# EAGLE board Mutli-Stepper-Driver Rev 2 (EAGLE 8.0.0)
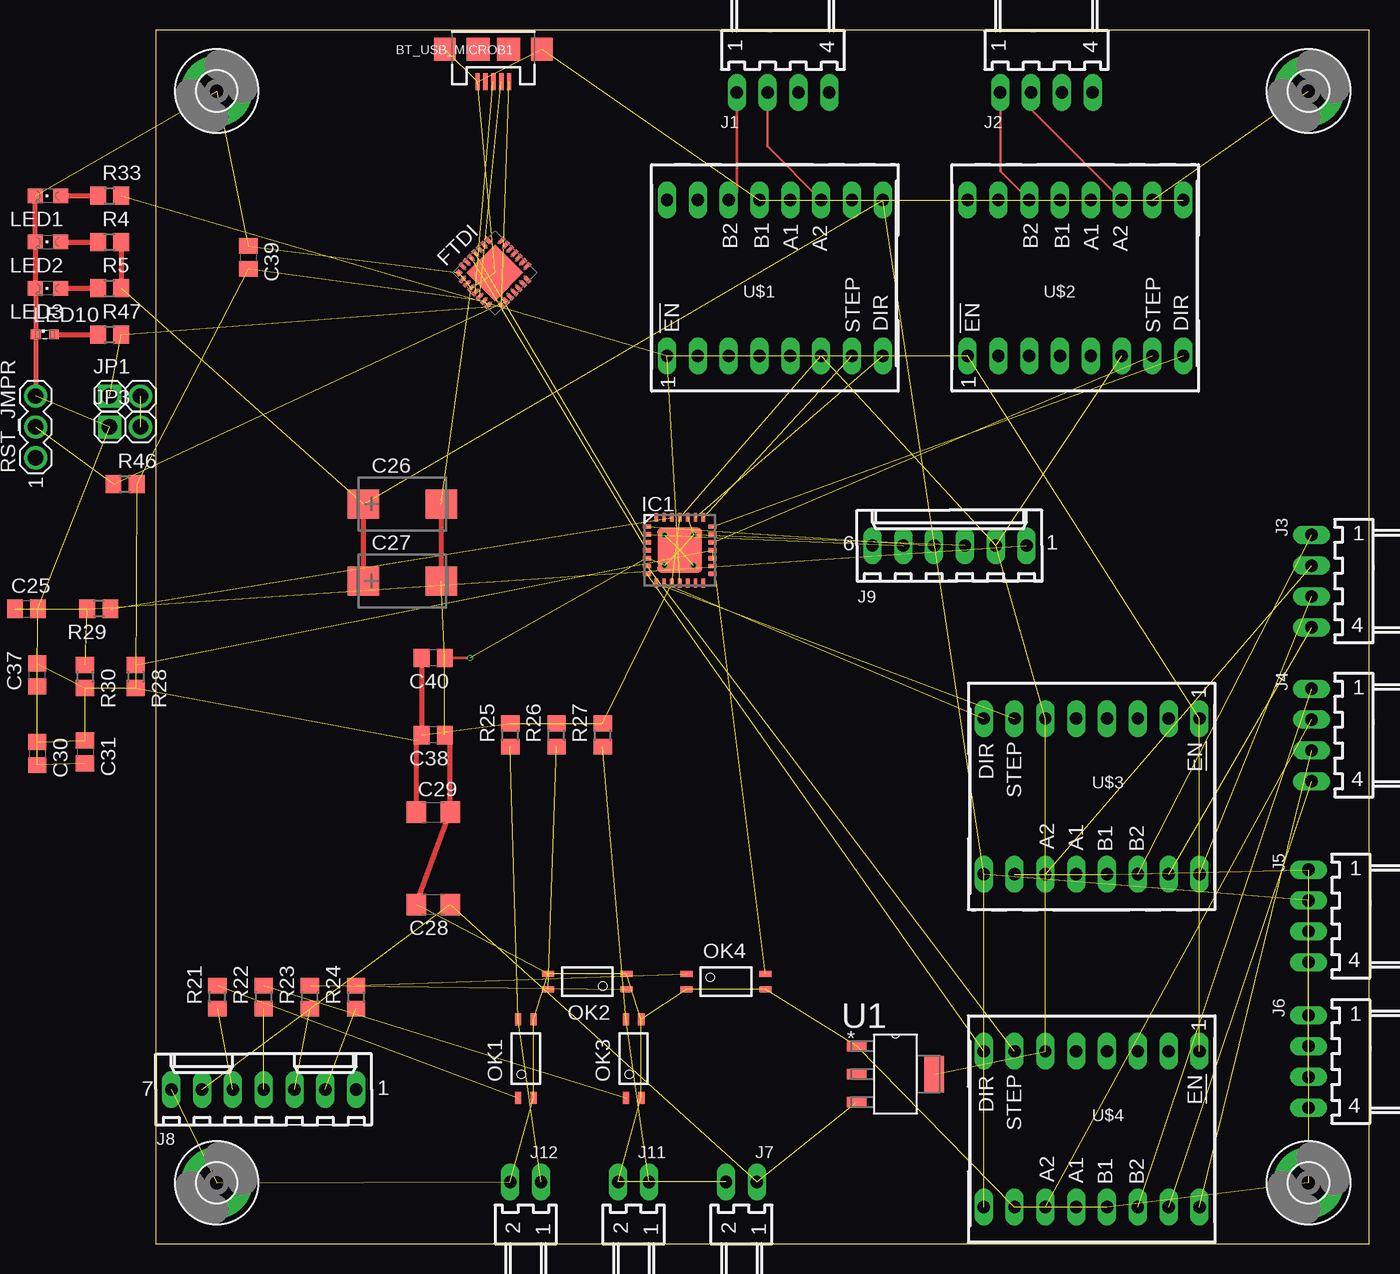
[diagram p0: board, top side]
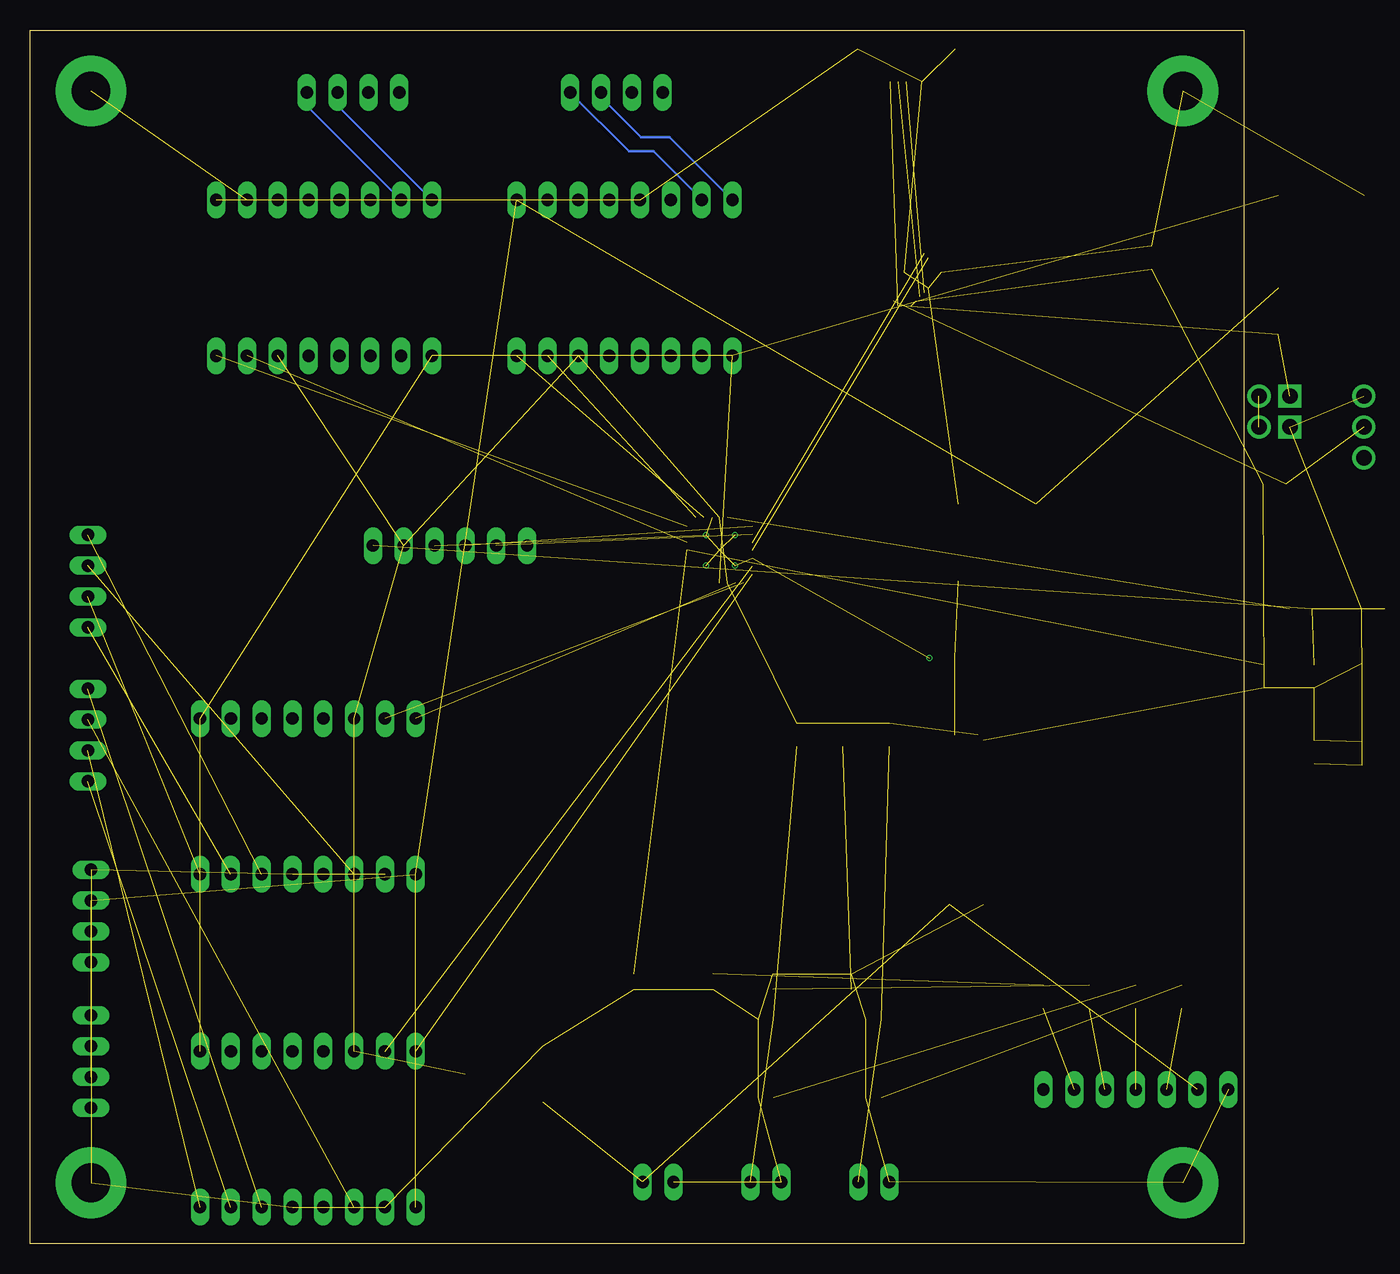
[diagram p1: board, bottom side, seen from below]

Size 100 x 100 mm. Coordinates in mm from the lower left corner, seen from the top.
Outline: 0,0 100,0 100,100 0,100 0,0
Copper layers (1*16): Top 0.035mm / dielectric 1.5mm / Bottom 0.035mm
Design rules "EagleRules-2-Layer-Shep": minimum track width 6mil, minimum drill 12mil, track to track 6mil, track to pad 6mil, pad to pad 6mil, via to via 6mil, smd to smd 0mil, copper to edge 10mil, drill to drill 10mil, minimum pad ring 2mil, minimum via ring 2mil, stop-mask expansion 2mil, vias tented up to drill 100mil, thermal gap 10mil

## Footprints (pad centres in the part's own frame; a part is rotated, then mirrored left to right if it is on the bottom)
USB-MICROB = smd 0.35 x 1.4: D+ 0,2.65; D- -0.65,2.65; GND 1.3,2.65; ID 0.65,2.65; VBUS -1.3,2.65 | smd 1.8 x 1.9: MT1 -4,0; MT2 4,0 | smd 1.9 x 1.9: P$1 -1.27,0; P$2 1.27,0
C0805 = smd 1.3 x 1.5: 1 -0.95,0; 2 0.95,0
CT7343 = smd 2.6 x 2.4: + -3.2,0; - 3.2,0
C3216 = smd 1.6 x 1.8: 1 -1.4,0; 2 1.4,0
MLP28 = smd 0.6 x 0.3: 1 -2.3,1.5; 2 -2.3,1; 3 -2.3,0.5; 4 -2.3,0; 5 -2.3,-0.5; 6 -2.3,-1; 7 -2.3,-1.5; 15 2.3,-1.5; 16 2.3,-1; 17 2.3,-0.5; 18 2.3,0; 19 2.3,0.5; 20 2.3,1; 21 2.3,1.5 | smd 0.3 x 0.6: 8 -1.5,-2.3; 9 -1,-2.3; 10 -0.5,-2.3; 11 0,-2.3; 12 0.5,-2.3; 13 1,-2.3; 14 1.5,-2.3; 22 1.5,2.3; 23 1,2.3; 24 0.5,2.3; 25 0,2.3; 26 -0.5,2.3; 27 -1,2.3; 28 -1.5,2.3 | smd 3.3 x 3.3: EXP 0,0 | smd 0.435 x 0.435: M -2.103,2.103
3,2-PAD = drill 3.2 pad 5.842: B3,2 0,0
MICROCHIP_QFN28-ML_6X6MM = smd 0.7 x 0.35: 1 -2.7,1.95; 2 -2.7,1.3; 3 -2.7,0.65; 4 -2.7,0; 5 -2.7,-0.65; 6 -2.7,-1.3; 7 -2.7,-1.95; 15 2.7,-1.95; 16 2.7,-1.3; 17 2.7,-0.65; 18 2.7,0; 19 2.7,0.65; 20 2.7,1.3; 21 2.7,1.95 | smd 0.35 x 0.7: 8 -1.95,-2.7; 9 -1.3,-2.7; 10 -0.65,-2.7; 11 0,-2.7; 12 0.65,-2.7; 13 1.3,-2.7; 14 1.95,-2.7; 22 1.95,2.7; 23 1.3,2.7; 24 0.65,2.7; 25 0,2.7; 26 -0.65,2.7; 27 -1.3,2.7; 28 -1.95,2.7 | smd 3.7 x 3.7: EXP 0,0
7395-04 = drill 1.016 long: 1 3.81,0; 2 1.27,0; 3 -1.27,0; 4 -3.81,0
SON_OF_DARK_POWERSCH_7395-02 = drill 1.016 long: 1 1.27,0; 2 -1.27,0
6410-07 = drill 1.016 long: 1 7.62,0; 2 5.08,0; 3 2.54,0; 4 0,0; 5 -2.54,0; 6 -5.08,0; 7 -7.62,0
6410-06 = drill 1.016 long: 1 6.35,0; 2 3.81,0; 3 1.27,0; 4 -1.27,0; 5 -3.81,0; 6 -6.35,0
1X02 = drill 1.27 square: 1 -1.27,0 | drill 1.27: 2 1.27,0
CHIPLED_0805 = smd 1.2 x 1.2: A 0,-1.05; C 0,1.05
SML0603 = smd 0.8 x 0.8: A 0.75,0; C -0.75,0
MINI-FLAT-4 = smd 1 x 0.5: 1 -3.24,0.635; 2 -3.24,-0.635; 3 3.24,-0.635; 4 3.24,0.635
R0805 = smd 1.3 x 1.5: 1 -0.95,0; 2 0.95,0
MA03-1 = drill 1.27: 1 -2.54,0; 2 0,0; 3 2.54,0
NSC-LMS8117AMP_SOT230P696X180-4N = smd 1.6 x 0.838: 1 -3.2,2.311; 2 -3.2,0; 3 -3.2,-2.311 | smd 1.6 x 3.023: 4 3.2,0
6410-08 = drill 1.016 long: 1 -0.1,13.62; 2 -0.1,11.08; 3 -0.1,8.54; 4 -0.1,6; 5 -0.1,3.46; 6 -0.1,0.92; 7 -0.1,-1.62; 8 -0.1,-4.16; 9 12.74,-4.16; 10 12.74,-1.62; 11 12.74,0.92; 12 12.74,8.54; 13 12.74,11.08; 14 12.74,13.62; 15 12.74,3.46; 16 12.74,6

## Placement (x,y rotation side)
BT_USB_MICROB1  USB-MICROB  [USB-MICROB]  27.81,98.42 180 top
C25  [C0805]  -10.67,52.32 0 top  (outside the outline)
C26  [CT7343]  20.32,60.96 0 top
C27  100 uF  [CT7343]  20.32,54.61 0 top
C28  10 uF  [C3216]  22.86,27.94 180 top
C29  10 uF  [C3216]  22.86,35.56 0 top
C30  [C0805]  -9.78,40.39 270 top  (outside the outline)
C31  [C0805]  -5.84,40.51 270 top  (outside the outline)
C37  1uF  [C0805]  -9.78,46.86 90 top  (outside the outline)
C38  0.1uF  [C0805]  22.86,41.91 180 top
C39  0.1uF  [C0805]  7.62,81.28 270 top
C40  4.7uF  [C0805]  22.86,48.26 180 top
FTDI  CP2102  [MLP28]  27.94,80.01 45 top
H1  MOUNT-PAD-ROUND3.2  [3,2-PAD]  5,5 0 top
H2  MOUNT-PAD-ROUND3.2  [3,2-PAD]  5,95 0 top
H3  MOUNT-PAD-ROUND3.2  [3,2-PAD]  95,95 0 top
H4  MOUNT-PAD-ROUND3.2  [3,2-PAD]  95,5 0 top
IC1  PIC24FJ64GB002  [MICROCHIP_QFN28-ML_6X6MM]  43.18,57.15 0 top
J1  22-05-7048-04  [7395-04]  51.69,94.87 180 top
J2  22-05-7048-04  [7395-04]  73.41,94.87 180 top
J3  22-05-7048-04  [7395-04]  95.25,54.61 90 top
J4  22-05-7048-04  [7395-04]  95.25,41.91 90 top
J5  22-05-7048-04  [7395-04]  95,27 90 top
J6  22-05-7048-04  [7395-04]  95,15 90 top
J7  SON_OF_DARK_POWERSCH_22-05-7028-02  [SON_OF_DARK_POWERSCH_7395-02]  48.26,5.08 0 top
J8  22-27-2071-07  [6410-07]  8.89,12.7 0 top
J9  22-27-2061-06  [6410-06]  65.41,57.53 0 top
J11  SON_OF_DARK_POWERSCH_22-05-7028-02  [SON_OF_DARK_POWERSCH_7395-02]  39.37,5.08 0 top
J12  SON_OF_DARK_POWERSCH_22-05-7028-02  [SON_OF_DARK_POWERSCH_7395-02]  30.48,5.08 0 top
JP1  [1X02]  -2.54,69.85 0 top
JP3  [1X02]  -2.54,67.31 0 top
LED1  [CHIPLED_0805]  -8.89,86.36 90 top  (outside the outline)
LED2  [CHIPLED_0805]  -8.89,82.55 90 top  (outside the outline)
LED3  [CHIPLED_0805]  -8.89,78.74 90 top  (outside the outline)
LED10  [SML0603]  -9.14,74.93 0 top  (outside the outline)
OK1  TLP283  [MINI-FLAT-4]  30.48,15.24 90 top
OK2  TLP283  [MINI-FLAT-4]  35.56,21.59 180 top
OK3  TLP283  [MINI-FLAT-4]  39.37,15.24 90 top
OK4  TLP283  [MINI-FLAT-4]  46.99,21.59 0 top
R4  [R0805]  -3.81,82.55 0 top
R5  [R0805]  -3.81,78.74 0 top
R21  [R0805]  5.08,20.32 90 top
R22  [R0805]  8.89,20.32 90 top
R23  [R0805]  12.7,20.32 90 top
R24  [R0805]  16.51,20.32 90 top
R25  [R0805]  29.21,41.91 90 top
R26  [R0805]  33.02,41.91 90 top
R27  [R0805]  36.83,41.91 90 top
R28  [R0805]  -1.65,46.74 270 top
R29  [R0805]  -4.7,52.32 180 top  (outside the outline)
R30  [R0805]  -5.84,46.74 270 top  (outside the outline)
R33  [R0805]  -3.81,86.36 0 top
R46  1k  [R0805]  -2.54,62.61 0 top
R47  500  [R0805]  -3.81,74.93 0 top
RST_JMPR  [MA03-1]  -9.91,67.31 90 top  (outside the outline)
U1  LMS8117AMP-3.3  [NSC-LMS8117AMP_SOT230P696X180-4N]  60.96,13.97 0 top
U$1  DRIVER  [6410-08]  55.75,73.28 90 top
U$2  DRIVER  [6410-08]  80.52,73.28 90 top
U$3  DRIVER  [6410-08]  72.39,43.18 270 top
U$4  DRIVER  [6410-08]  72.39,15.75 270 top

## Library data of the parts
BT_USB_MICROB1 = Mother-Board-rev5; PROD_ID: CONN-09505
C25-C31 R4 R5 R21-R30 R33 = rcl
C37-C40 R46 R47 = resistor
FTDI = silabs; MF: FARNELL; MPN: CP2102-GM; OC_FARNELL: 9282130; OC_NEWARK: 30K5635
H1-H4 = holes
IC1 = MotherboardRev2
J1-J6 = Son_of_Dark_Power; OC_FARNELL: unknown; OC_NEWARK: unknown
J7 J11 J12 = MotherboardRev2; OC_FARNELL: 9731601; OC_NEWARK: unknown
J8 J9 = con-molex; OC_FARNELL: unknown; OC_NEWARK: unknown
JP1 JP3 = pinhead
LED1-LED3 = led
LED10 = interface_board-rev13
OK1-OK4 = optocoupler; OC_FARNELL: unknown; OC_NEWARK: unknown
RST_JMPR = con-lstb; OC_FARNELL: unknown; OC_NEWARK: unknown
U1 = MotherboardRev2; MPN: LMS8117AMP-3.3; OC_FARNELL: 1469032; OC_NEWARK: 41K3020; PACKAGE: SOT-223-3; SUPPLIER: National Semiconductor
U$1-U$4 = con-molex

## Nets
+5V: JP1.2 JP3.2
+VIN: C28.1 J7.1 J8.6 U1.3
A1: J1.4 U$1.13
A1(2): J2.4 U$2.13
A1(3): J3.4 U$3.13
A1(4): J4.4 U$4.13
A2: J1.3 U$1.14
A2(2): J2.3 U$2.14
A2(3): J3.3 U$3.14
A2(4): J4.3 U$4.14
B1: J1.1 U$1.12
B1(2): J2.1 U$2.12
B1(3): J3.1 U$3.12
B1(4): J4.1 U$4.12
B2: J1.2 U$1.11
B2(2): J2.2 U$2.11
B2(3): J3.2 U$3.11
B2(4): J4.2 U$4.11
BT_D+: BT_USB_MICROB1.D+ FTDI.4
BT_D-: BT_USB_MICROB1.D- FTDI.5
BUTTON0: J12.1 OK1.4 R25.1
BUTTON1: J11.1 OK3.4 R27.1
BUTTON2: IC1.15
BUTTON3: IC1.18 OK4.4 R28.1
D0: J8.5 R21.1
D1: J8.4 R22.1
D2: J8.3 R23.1
D3: J8.2 R24.1
DIR1: IC1.23 U$1.8
DIR2: IC1.21 U$2.8
DIR3: IC1.9 U$3.8
DIR4: IC1.7 U$4.8
ENABLEALL: IC1.11 R33.2 U$1.1 U$2.1 U$3.1 U$4.1
GND: BT_USB_MICROB1.GND BT_USB_MICROB1.MT1 BT_USB_MICROB1.MT2 C25.2 C26.- C27.- C28.2 C29.2 C30.2 C31.2 C37.1 C38.1 C39.1 C40.1 FTDI.3 FTDI.EXP FTDI.M H1.B3,2 H2.B3,2 H3.B3,2 H4.B3,2 IC1.5 IC1.24 IC1.EXP J5.1 J5.4 J6.1 J6.4 J7.2 J8.7 J9.3 J11.2 J12.2 JP3.1 LED1.C LED2.C LED3.C LED10.C OK1.2 OK1.3 OK2.2 OK2.3 OK3.2 OK3.3 OK4.2 OK4.3 RST_JMPR.3 U1.1 U$1.10 U$1.16 U$2.10 U$2.16 U$3.10 U$3.16 U$4.10 U$4.16
LVP: J9.6
MCLR: IC1.26 R29.1
MCLR': C25.1 J9.1 R29.2 R30.1
N$2: LED2.A R4.1
N$9: FTDI.9 R46.1 RST_JMPR.2
N$10: LED10.A R47.1
N$12: LED3.A R5.1
N$37: OK2.1 R23.2
N$40: OK4.1 R24.2
N$42: LED1.A R33.1
N$43: OK1.1 R21.2
N$47: OK3.1 R22.2
N$49: IC1.13
N$50: IC1.14
NC_1_FTDI: FTDI.12
NC_2_FTDI: FTDI.11
NC_3_FTDI: FTDI.2
NC_4_FTDI: FTDI.1
NC_5_FTDI: FTDI.28
NC_6_FTDI: FTDI.27
NC_7_FTDI: FTDI.24
NC_8_FTDI: FTDI.23
PGC1: IC1.2 J9.5
PGD1: IC1.1 J9.4
RX: FTDI.26 IC1.4
SLEEPALL: OK2.4 R26.1
STEP1: IC1.22 U$1.7
STEP2: IC1.19 U$2.7
STEP3: IC1.8 U$3.7
STEP4: IC1.6 U$4.7
TX: FTDI.25 IC1.3
VBUS: BT_USB_MICROB1.VBUS FTDI.8 JP1.1 R47.2
VDD: C29.1 C30.1 C31.1 C37.2 C38.2 C39.2 C40.2 FTDI.6 FTDI.7 IC1.10 IC1.25 J9.2 R25.2 R26.2 R27.2 R28.2 R30.2 R46.2 U1.4 U$1.6 U$2.6 U$3.6 U$4.6
VM: C26.+ C27.+ J5.2 J5.3 J6.2 J6.3 R4.2 R5.2 U$1.9 U$2.9 U$3.9 U$4.9
VT: J8.1

## Tracks (layer width: path | path; a pad name or v marks a point on that pad's centre or on a via)
+5V  (1 unrouted)
+VIN  (3 unrouted)
A1
  Bottom 0.203: J1.4 50.67,90.04 48.64,90.04 44.67,86.08 U$1.13
A1(2)
  Bottom 0.203: U$2.13 77.22,93.8 J2.4
A1(3)  (1 unrouted)
A1(4)  (1 unrouted)
A2
  Bottom 0.203: U$1.14 47.3,91.19 49.66,91.19 52.96,94.49 J1.3
A2(2)
  Bottom 0.203: U$2.14 74.68,93.8 J2.3
A2(3)  (1 unrouted)
A2(4)  (1 unrouted)
B1
  Top 0.203: U$1.12 47.88,86.69 J1.1
B1(2)
  Top 0.203: U$2.12 69.6,88.4 J2.1
B1(3)  (1 unrouted)
B1(4)  (1 unrouted)
B2
  Top 0.203: U$1.11 50.42,90.43 J1.2
B2(2)
  Top 0.203: U$2.11 72.14,93.48 J2.2
B2(3)  (1 unrouted)
B2(4)  (1 unrouted)
BT_D+  (1 unrouted)
BT_D-  (1 unrouted)
BUTTON0  (2 unrouted)
BUTTON1  (2 unrouted)
BUTTON3  (2 unrouted)
D0  (1 unrouted)
D1  (1 unrouted)
D2  (1 unrouted)
D3  (1 unrouted)
DIR1  (1 unrouted)
DIR2  (1 unrouted)
DIR3  (1 unrouted)
DIR4  (1 unrouted)
ENABLEALL  (5 unrouted)
GND  (via drill 0.33)  (52 unrouted)
  Top 0.203: C40.1 v25.91,48.26
  Top 0.406: C38.1 24.26,41.46 C29.2 C28.2 | LED1.C LED2.C LED3.C -9.89,78.69 LED10.C -9.91,74.92 RST_JMPR.3 | C26.- C27.-
  other vias: 41.91,58.42 44.32,58.42 44.32,55.88 41.91,55.88
  cutout Bottom (isolate 0.254): -17.4,115.19 124.71,115.19 124.71,0 124.71,-24.38 10.41,-24.38 -17.4,-24.38
MCLR  (1 unrouted)
MCLR'  (3 unrouted)
N$2
  Top 0.406: LED2.A R4.1
N$9  (2 unrouted)
N$10
  Top 0.406: LED10.A R47.1
N$12
  Top 0.406: LED3.A R5.1
N$37  (1 unrouted)
N$40  (1 unrouted)
N$42
  Top 0.406: LED1.A R33.1
N$43  (1 unrouted)
N$47  (1 unrouted)
PGC1  (1 unrouted)
PGD1  (1 unrouted)
RX  (1 unrouted)
SLEEPALL  (1 unrouted)
STEP1  (1 unrouted)
STEP2  (1 unrouted)
STEP3  (1 unrouted)
STEP4  (1 unrouted)
TX  (1 unrouted)
VBUS  (3 unrouted)
VDD  (20 unrouted)
  Top 0.406: 21.91,35.56 C29.1 21.46,41.46 arc-90 C38.2 C40.2
VM  (9 unrouted)
  Top 0.406: R4.2 R5.2 | C27.+ C26.+